# Altium PCB PC104Breakout.PcbDoc
Units mil, origin at the board's own origin, x right, y up, seen from the top; angles counter-clockwise.
Board outline 6500 x 2225 mil, 2 copper layers (Top Layer, Bottom Layer); 107 components, 105 nets, 212 pads, 0 vias.
Unrouted connection lines stored in the file: 1.
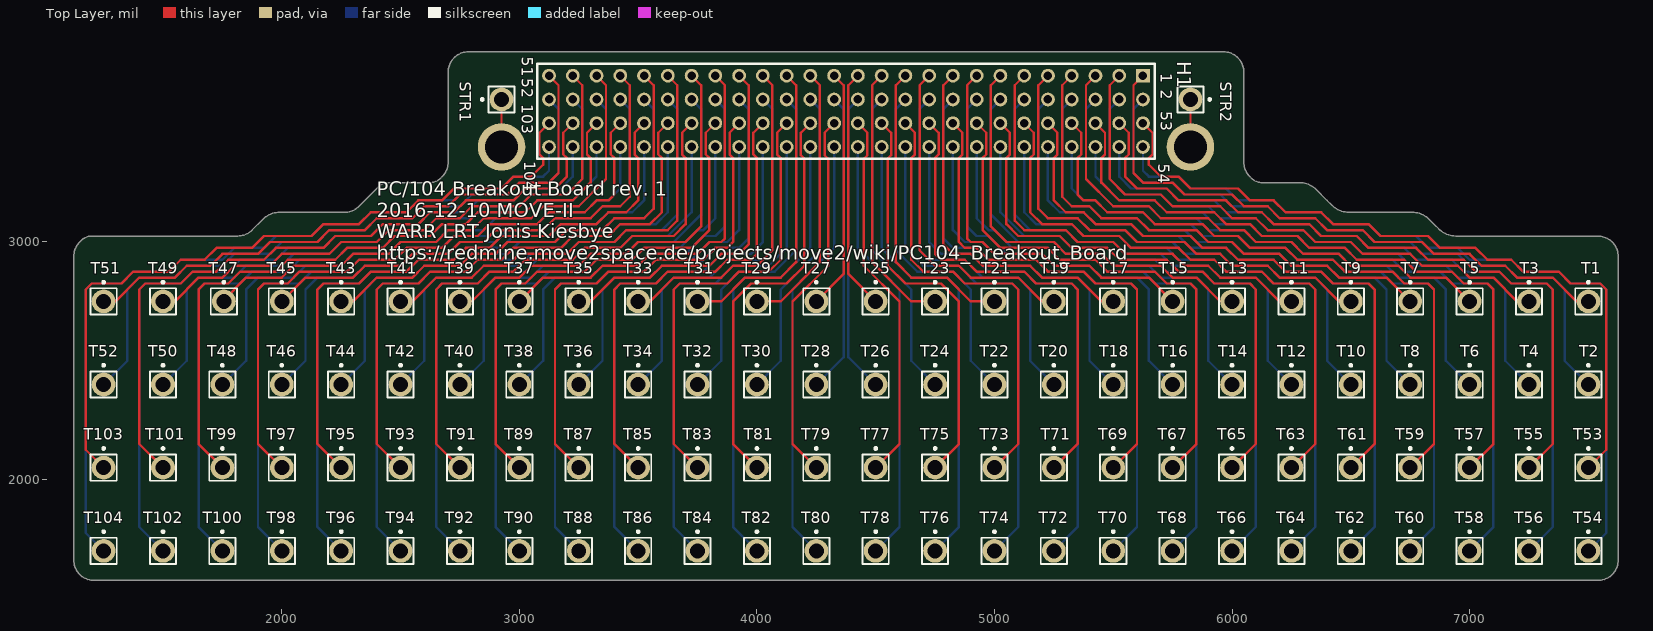
[diagram p0: Top Layer view]
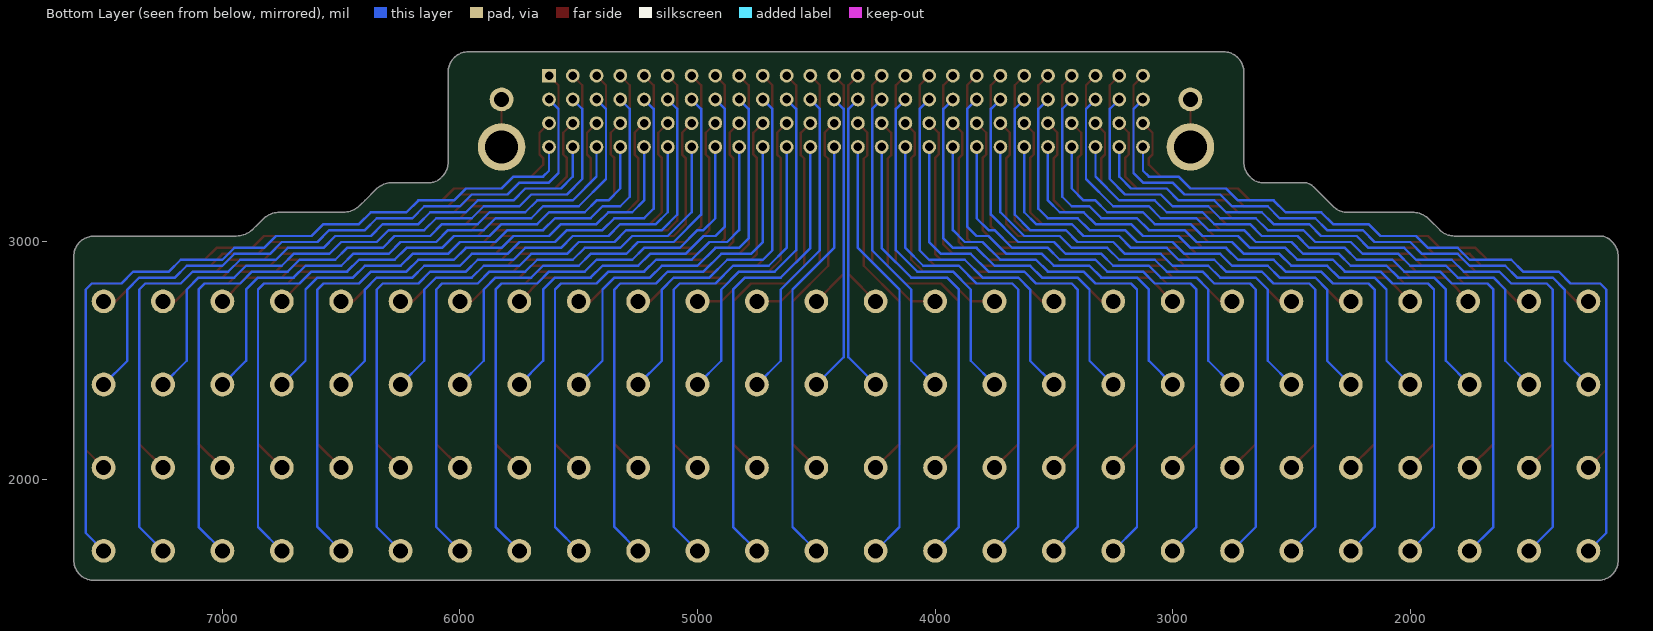
[diagram p1: Bottom Layer view, seen from below]

## Layer stack, top to bottom
Top Solder: solder mask 0.4, Solder Resist, Dk 3.5
Top Layer: signal copper 1.4
Dielectric 1: dielectric 12.6, FR-4, Dk 4.8
Bottom Layer: signal copper 1.4
Bottom Solder: solder mask 0.4, Solder Resist, Dk 3.5

## Board outline
1725,3025 1200,3025 ccw(c1200,2964.64) 1157.32,3007.32 1150,3000 ccw(c1210.36,2939.64) 1125,2939.64 1125,2700 1125,1660.36 ccw(c1210.36,1660.36) 1150,1600 ccw(c1210.36,1660.36) 1210.36,1575 1375,1575 7539.64,1575 ccw(c7539.64,1660.36) 7600,1600 ccw(c7539.64,1660.36) 7625,1660.36 7625,1700 7625,2939.64 ccw(c7539.64,2939.64) 7600,3000 ccw(c7539.64,2939.64) 7539.64,3025 7425,3025 7025,3025 6950,3025 6941.42,3025 cw(c6941.42,3125) 6870.71,3054.29 6850,3075 6829.29,3095.71 ccw(c6758.58,3025) 6758.58,3125 6500,3125 6491.42,3125 cw(c6491.42,3225) 6420.71,3154.29 6400,3175 6354.29,3220.71 ccw(c6283.58,3150) 6283.58,3250 6125,3250 cw(c6125,3310.36) 6082.32,3267.68 6075,3275 cw(c6135.36,3335.36) 6050,3335.36 6050,3400 6050,3633.58 6050,3714.64 ccw(c5964.64,3714.64) 6025,3775 ccw(c5964.64,3714.64) 5964.64,3800 5825,3800 2825,3800 2785.36,3800 ccw(c2785.36,3714.64) 2725,3775 ccw(c2785.36,3714.64) 2700,3714.64 2700,3575 2700,3335.36 cw(c2614.64,3335.36) 2675,3275 2667.68,3267.68 cw(c2625,3310.36) 2625,3250 2450,3250 ccw(c2450,3189.64) 2407.32,3232.32 2325,3150 cw(c2264.64,3210.36) 2264.64,3125 2250,3125 1991.42,3125 ccw(c1991.42,3025) 1920.71,3095.71 1875,3050 cw(c1814.64,3110.36) 1814.64,3025 1725,3025

## Design rules (kind name [scope] priority, off if disabled: settings)
Clearance [All] p1: gap=6
HoleSize [All] p1: absolutevalues=TRUE maxlimit=200 minlimit=1 maxpercent=80.000 minpercent=20.000
MinimumSolderMaskSliver [All] p1: minsoldermaskwidth=4
PolygonConnect [All] p1: connectstyle=Relief reliefconductorwidth=10 reliefentries=4 polygonreliefangle="90 Angle" airgapwidth=10
RoutingVias [All] p1: holewidth=28 width=50 viastyle="Through Hole" minholewidth=28 minwidth=50 maxholewidth=28 maxwidth=50
SolderMaskExpansion [All] p1: expansion=2
Width [All] p1: maxlimit=10 minlimit=6 preferedwidth=10
28 further rules are at their usual default settings.

## Components (designator, comment, footprint, x,y, rotation, side; value= is the part's Value field where it differs from the comment)
H1 "MOVE-II PC104" PC104 5625,3700 r180 top
STR1 "Testpoint" PIN1 2925,3600 r90 top
STR2 "Testpoint" PIN1 5825,3600 r270 top
T1 "Testpoint" PIN1 7500,2750 r0 top
T2 "Testpoint" PIN1 7500,2400 r0 top
T3 "Testpoint" PIN1 7250,2750 r0 top
T4 "Testpoint" PIN1 7250,2400 r0 top
T5 "Testpoint" PIN1 7000,2750 r0 top
T6 "Testpoint" PIN1 7000,2400 r0 top
T7 "Testpoint" PIN1 6750,2750 r0 top
T8 "Testpoint" PIN1 6750,2400 r0 top
T9 "Testpoint" PIN1 6500,2750 r0 top
T10 "Testpoint" PIN1 6500,2400 r0 top
T11 "Testpoint" PIN1 6250,2750 r0 top
T12 "Testpoint" PIN1 6250,2400 r0 top
T13 "Testpoint" PIN1 6000,2750 r0 top
T14 "Testpoint" PIN1 6000,2400 r0 top
T15 "Testpoint" PIN1 5750,2750 r0 top
T16 "Testpoint" PIN1 5750,2400 r0 top
T17 "Testpoint" PIN1 5500,2750 r0 top
T18 "Testpoint" PIN1 5500,2400 r0 top
T19 "Testpoint" PIN1 5250,2750 r0 top
T20 "Testpoint" PIN1 5250,2400 r0 top
T21 "Testpoint" PIN1 5000,2750 r0 top
T22 "Testpoint" PIN1 5000,2400 r0 top
T23 "Testpoint" PIN1 4750,2750 r0 top
T24 "Testpoint" PIN1 4750,2400 r0 top
T25 "Testpoint" PIN1 4500,2750 r0 top
T26 "Testpoint" PIN1 4500,2400 r0 top
T27 "Testpoint" PIN1 4250,2750 r0 top
T28 "Testpoint" PIN1 4250,2400 r0 top
T29 "Testpoint" PIN1 4000,2750 r0 top
T30 "Testpoint" PIN1 4000,2400 r0 top
T31 "Testpoint" PIN1 3750,2750 r0 top
T32 "Testpoint" PIN1 3750,2400 r0 top
T33 "Testpoint" PIN1 3500,2750 r0 top
T34 "Testpoint" PIN1 3500,2400 r0 top
T35 "Testpoint" PIN1 3250,2750 r0 top
T36 "Testpoint" PIN1 3250,2400 r0 top
T37 "Testpoint" PIN1 3000,2750 r0 top
T38 "Testpoint" PIN1 3000,2400 r0 top
T39 "Testpoint" PIN1 2750,2750 r0 top
T40 "Testpoint" PIN1 2750,2400 r0 top
T41 "Testpoint" PIN1 2500,2750 r0 top
T42 "Testpoint" PIN1 2500,2400 r0 top
T43 "Testpoint" PIN1 2250,2750 r0 top
T44 "Testpoint" PIN1 2250,2400 r0 top
T45 "Testpoint" PIN1 2000,2750 r0 top
T46 "Testpoint" PIN1 2000,2400 r0 top
T47 "Testpoint" PIN1 1756.24,2750 r0 top
T48 "Testpoint" PIN1 1750,2400 r0 top
T49 "Testpoint" PIN1 1500,2750 r0 top
T50 "Testpoint" PIN1 1500,2400 r0 top
T51 "Testpoint" PIN1 1250,2750 r0 top
T52 "Testpoint" PIN1 1250,2400 r0 top
T53 "Testpoint" PIN1 7500,2050 r0 top
T54 "Testpoint" PIN1 7500,1700 r0 top
T55 "Testpoint" PIN1 7250,2050 r0 top
T56 "Testpoint" PIN1 7250,1700 r0 top
T57 "Testpoint" PIN1 7000,2050 r0 top
T58 "Testpoint" PIN1 7000,1700 r0 top
T59 "Testpoint" PIN1 6750,2050 r0 top
T60 "Testpoint" PIN1 6750,1700 r0 top
T61 "Testpoint" PIN1 6500,2050 r0 top
T62 "Testpoint" PIN1 6500,1700 r0 top
T63 "Testpoint" PIN1 6250,2050 r0 top
T64 "Testpoint" PIN1 6250,1700 r0 top
T65 "Testpoint" PIN1 6000,2050 r0 top
T66 "Testpoint" PIN1 6000,1700 r0 top
T67 "Testpoint" PIN1 5750,2050 r0 top
T68 "Testpoint" PIN1 5750,1700 r0 top
T69 "Testpoint" PIN1 5500,2050 r0 top
T70 "Testpoint" PIN1 5500,1700 r0 top
T71 "Testpoint" PIN1 5250,2050 r0 top
T72 "Testpoint" PIN1 5250,1700 r0 top
T73 "Testpoint" PIN1 5000,2050 r0 top
T74 "Testpoint" PIN1 5000,1700 r0 top
T75 "Testpoint" PIN1 4750,2050 r0 top
T76 "Testpoint" PIN1 4750,1700 r0 top
T77 "Testpoint" PIN1 4500,2050 r0 top
T78 "Testpoint" PIN1 4500,1700 r0 top
T79 "Testpoint" PIN1 4250,2050 r0 top
T80 "Testpoint" PIN1 4250,1700 r0 top
T81 "Testpoint" PIN1 4000,2050 r0 top
T82 "Testpoint" PIN1 4000,1700 r0 top
T83 "Testpoint" PIN1 3750,2050 r0 top
T84 "Testpoint" PIN1 3750,1700 r0 top
T85 "Testpoint" PIN1 3500,2050 r0 top
T86 "Testpoint" PIN1 3500,1700 r0 top
T87 "Testpoint" PIN1 3250,2050 r0 top
T88 "Testpoint" PIN1 3250,1700 r0 top
T89 "Testpoint" PIN1 3000,2050 r0 top
T90 "Testpoint" PIN1 3000,1700 r0 top
T91 "Testpoint" PIN1 2750,2050 r0 top
T92 "Testpoint" PIN1 2750,1700 r0 top
T93 "Testpoint" PIN1 2500,2050 r0 top
T94 "Testpoint" PIN1 2500,1700 r0 top
T95 "Testpoint" PIN1 2250,2050 r0 top
T96 "Testpoint" PIN1 2250,1700 r0 top
T97 "Testpoint" PIN1 2000,2050 r0 top
T98 "Testpoint" PIN1 2000,1700 r0 top
T99 "Testpoint" PIN1 1750,2050 r0 top
T100 "Testpoint" PIN1 1750,1700 r0 top
T101 "Testpoint" PIN1 1500,2050 r0 top
T102 "Testpoint" PIN1 1500,1700 r0 top
T103 "Testpoint" PIN1 1250,2050 r0 top
T104 "Testpoint" PIN1 1250,1700 r0 top

## Footprints (in the part's own frame and the unit in brackets; to place one, negate y for a bottom-side part, rotate by r counter-clockwise, add the part's x,y. Pads: shape width x height; smd on the part's side, far side on the other; paste and mask are expansions set on the pad)
PC104 [mil] "3rd gen 1U EPS from clydespace"
  rect 58x58 hole 35.43: 1(0,0)
  round 58 hole 35.43: 2(0,100) 3(100,0) 4(100,100) 5(200,0) 6(200,100) 7(300,0) 8(300,100) 9(400,0) 10(400,100) 11(500,0) 12(500,100) 13(600,0) 14(600,100) 15(700,0) 16(700,100) 17(800,0) 18(800,100) 19(900,0) 20(900,100) 21(1000,0) 22(1000,100) 23(1100,0) 24(1100,100) 25(1200,0) 26(1200,100) 27(1300,0) 28(1300,100) 29(1400,0) 30(1400,100) 31(1500,0) 32(1500,100) 33(1600,0) 34(1600,100) 35(1700,0) 36(1700,100) 37(1800,0) 38(1800,100) 39(1900,0) 40(1900,100) 41(2000,0) 42(2000,100) 43(2100,0) 44(2100,100) 45(2200,0) 46(2200,100) 47(2300,0) 48(2300,100) 49(2400,0) 50(2400,100) 51(2500,0) 52(2500,100) 53(0,200) 54(0,300) 55(100,200) 56(100,300) 57(200,200) 58(200,300) 59(300,200) 60(300,300) 61(400,200) 62(400,300) 63(500,200) 64(500,300) 65(600,200) 66(600,300) 67(700,200) 68(700,300) 69(800,200) 70(800,300) 71(900,200) 72(900,300) 73(1000,200) 74(1000,300) 75(1100,200) 76(1100,300) 77(1200,200) 78(1200,300) 79(1300,200) 80(1300,300) 81(1400,200) 82(1400,300) 83(1500,200) 84(1500,300) 85(1600,200) 86(1600,300) 87(1700,200) 88(1700,300) 89(1800,200) 90(1800,300) 91(1900,200) 92(1900,300) 93(2000,200) 94(2000,300) 95(2100,200) 96(2100,300) 97(2200,200) 98(2200,300) 99(2300,200) 100(2300,300) 101(2400,200) 102(2400,300) 103(2500,200) 104(2500,300)
  silkscreen extent -50,-50 2550,350
PIN1 [mil] "Connector; Plug"
  round 100 hole 63: 1(0,0)
  silkscreen extent -55,-55 55,86

## Part data
STR1 STR2 T1 T2 T3 T4 T5 T6 T7 T8 T9 T10 T11 T12 T13 T14 T15 T16 T17 T18 T19 T20 T21 T22 T23 T24 T25 T26 T27 T28 T29 T30 T31 T32 T33 T34 T35 T36 T37 T38 T39 T40 T41 T42 T43 T44 T45 T46 T47 T48 T49 T50 T51 T52 T53 T54 T55 T56 T57 T58 T59 T60 T61 T62 T63 T64 T65 T66 T67 T68 T69 T70 T71 T72 T73 T74 T75 T76 T77 T78 T79 T80 T81 T82 T83 T84 T85 T86 T87 T88 T89 T90 T91 T92 T93 T94 T95 T96 T97 T98 T99 T100 T101 T102 T103 T104: library part Plug, "Plug"

## Free pads (board coordinates)
  round 200 hole 138: 2(5825,3400) 3(2925,3400)

## Nets (pads, with @x,y where several pads share a name; then routed paths per layer and width w, separated by ;. In a path a pad name is that pad's centre, name@x,y a point inside that pad or via, vN(x,y) a via of type N, cw(c..) or ccw(c..) an arc to the next point about the centre after c; other vN are vias at no path point)
CHASSIS: pad.2 pad.3 STR1.1 STR2.1 | length 400
  Top Layer w10: pad.3 STR1.1 ; pad.2 STR2.1
TRACE1: H1.1 T1.1 | length 2565.2
  Top Layer w10: H1.1 5585,3660 5585,3290 5625,3250 5750,3250 5800,3200 6000,3200 6050,3150 6150,3150 6200,3100 6350,3100 6400,3050 6550,3050 6600,3000 6800,3000 6850,2950 7000,2950 7050,2900 7150,2900 7200,2850 7350,2850 7450,2750 T1.1
TRACE2: H1.2 T2.1 | length 2786
  Bottom Layer w10: H1.2 5585,3560 5585,3290 5625,3250 5750,3250 5800,3200 5950,3200 6000,3150 6150,3150 6200,3100 6350,3100 6400,3050 6550,3050 6600,3000 6750,3000 6800,2950 6950,2950 7000,2900 7150,2900 7200,2850 7350,2850 7400,2800 7400,2500 T2.1
TRACE3: H1.3 T3.1 | length 2429.9
  Top Layer w10: H1.3 5485,3660 5485,3265 5550,3200 5700,3200 5750,3150 5950,3150 6000,3100 6100,3100 6150,3050 6300,3050 6350,3000 6500,3000 6550,2950 6750,2950 6800,2900 6950,2900 7000,2850 7100,2850 7200,2750 T3.1
TRACE4: H1.4 T4.1 | length 2650.6
  Bottom Layer w10: H1.4 5485,3560 5485,3265 5550,3200 5700,3200 5750,3150 5900,3150 5950,3100 6100,3100 6150,3050 6300,3050 6350,3000 6500,3000 6550,2950 6700,2950 6750,2900 6900,2900 6950,2850 7100,2850 7150,2800 7150,2500 T4.1
TRACE5: H1.5 T5.1 | length 2279.9
  Top Layer w10: H1.5 5385,3660 5385,3265 5500,3150 5650,3150 5700,3100 5900,3100 5950,3050 6050,3050 6100,3000 6250,3000 6300,2950 6450,2950 6500,2900 6700,2900 6750,2850 6900,2850 T5.1
TRACE6: H1.6 T6.1 | length 2500.6
  Bottom Layer w10: H1.6 5385,3560 5385,3265 5500,3150 5650,3150 5700,3100 5850,3100 5900,3050 6050,3050 6100,3000 6250,3000 6300,2950 6450,2950 6500,2900 6650,2900 6700,2850 6850,2850 6900,2800 6900,2500 T6.1
TRACE7: H1.7 T7.1 | length 2173.8
  Top Layer w10: H1.7 5285,3660 5285,3190 5325,3150 5400,3150 5450,3100 5600,3100 5650,3050 5850,3050 5900,3000 6000,3000 6050,2950 6200,2950 6250,2900 6400,2900 6450,2850 6650,2850 T7.1
TRACE8: H1.8 T8.1 | length 2394.5
  Bottom Layer w10: H1.8 5285,3560 5285,3190 5325,3150 5400,3150 5450,3100 5600,3100 5650,3050 5800,3050 5850,3000 6000,3000 6050,2950 6200,2950 6250,2900 6400,2900 6450,2850 6600,2850 6650,2800 6650,2500 T8.1
TRACE9: H1.9 T9.1 | length 2053.1
  Top Layer w10: H1.9 5185,3660 5185,3140 5225,3100 5350,3100 5400,3050 5550,3050 5600,3000 5800,3000 5850,2950 5950,2950 6000,2900 6150,2900 6200,2850 6350,2850 6450,2750 T9.1
TRACE10: H1.10 T10.1 | length 2273.8
  Bottom Layer w10: H1.10 5185,3560 5185,3140 5225,3100 5350,3100 5400,3050 5550,3050 5600,3000 5750,3000 5800,2950 5950,2950 6000,2900 6150,2900 6200,2850 6350,2850 6400,2800 6400,2500 T10.1
TRACE11: H1.11 T11.1 | length 1932.4
  Top Layer w10: H1.11 5085,3660 5085,3090 5125,3050 5300,3050 5350,3000 5500,3000 5550,2950 5750,2950 5800,2900 5900,2900 5950,2850 6100,2850 6200,2750 T11.1
TRACE12: H1.12 T12.1 | length 2138.5
  Bottom Layer w10: H1.12 5085,3560 5085,3115 5150,3050 5300,3050 5350,3000 5500,3000 5550,2950 5700,2950 5750,2900 5900,2900 5950,2850 6100,2850 6150,2800 6150,2500 T12.1
TRACE13: H1.13 T13.1 | length 1797
  Top Layer w10: H1.13 4985,3660 4985,3065 5050,3000 5250,3000 5300,2950 5450,2950 5500,2900 5700,2900 5750,2850 5850,2850 5950,2750 T13.1
TRACE14: H1.14 T14.1 | length 1988.5
  Bottom Layer w10: H1.14 4985,3560 4985,3115 5100,3000 5250,3000 5300,2950 5450,2950 5500,2900 5650,2900 5700,2850 5850,2850 5900,2800 5900,2500 T14.1
TRACE15: H1.15 T15.1 | length 1676.3
  Top Layer w10: H1.15 4885,3660 4885,3015 4900,3000 4950,3000 5000,2950 5200,2950 5250,2900 5400,2900 5450,2850 5650,2850 T15.1
TRACE16: H1.16 T16.1 | length 1867.8
  Bottom Layer w10: H1.16 4885,3560 4885,3065 4925,3025 4975,3025 5050,2950 5200,2950 5250,2900 5400,2900 5450,2850 5600,2850 5650,2800 5650,2500 T16.1
TRACE17: H1.17 T17.1 | length 1541
  Top Layer w10: H1.17 4785,3660 4785,2990 4825,2950 4900,2950 4950,2900 5150,2900 5200,2850 5350,2850 5450,2750 T17.1
TRACE18: H1.18 T18.1 | length 1747
  Bottom Layer w10: H1.18 4785,3560 4785,3015 4825,2975 4925,2975 5000,2900 5150,2900 5200,2850 5350,2850 5400,2800 5400,2500 T18.1
TRACE19: H1.19 T19.1 | length 1405.6
  Top Layer w10: H1.19 4685,3660 4685,2965 4750,2900 4850,2900 4900,2850 5100,2850 5200,2750 T19.1
TRACE20: H1.20 T20.1 | length 1626.3
  Bottom Layer w10: H1.20 4685,3560 4685,2965 4725,2925 4875,2925 4950,2850 5100,2850 5150,2800 5150,2500 T20.1
TRACE21: H1.21 T21.1 | length 1284.9
  Top Layer w10: H1.21 4585,3660 4585,2915 4650,2850 4800,2850 4900,2750 T21.1
TRACE22: H1.22 T22.1 | length 1476.3
  Bottom Layer w10: H1.22 4585,3560 4585,2965 4675,2875 4825,2875 4900,2800 4900,2500 T22.1
TRACE23: H1.23 T23.1 | length 1134.9
  Top Layer w10: H1.23 4485,3660 4485,2915 4650,2750 T23.1
TRACE24: H1.24 T24.1 | length 1326.3
  Bottom Layer w10: H1.24 4485,3560 4485,2965 4650,2800 4650,2500 T24.1
TRACE25: H1.25 T25.1 | length 1014.2
  Top Layer w10: H1.25 4385,3660 4385,2865 T25.1
TRACE26: H1.26 T26.1 | length 1264.2
  Bottom Layer w10: H1.26 4385,3560 4385,2515 T26.1
TRACE27: H1.27 T27.1 | length 1014.2
  Top Layer w10: T27.1 4365,2865 4365,3660 H1.27
TRACE28: H1.28 T28.1 | length 1264.2
  Bottom Layer w10: T28.1 4365,2515 4365,3560 H1.28
TRACE29: H1.29 T29.1 | length 1134.9
  Top Layer w10: T29.1 4100,2750 4265,2915 4265,3660 H1.29
TRACE30: H1.30 T30.1 | length 1326.3
  Bottom Layer w10: T30.1 4100,2500 4100,2800 4265,2965 4265,3560 H1.30
TRACE31: H1.31 T31.1 | length 1284.9
  Top Layer w10: T31.1 3850,2750 3950,2850 4100,2850 4165,2915 4165,3660 H1.31
TRACE32: H1.32 T32.1 | length 1476.3
  Bottom Layer w10: T32.1 3850,2500 3850,2800 3925,2875 4075,2875 4165,2965 4165,3560 H1.32
TRACE33: H1.33 T33.1 | length 1405.6
  Top Layer w10: T33.1 3550,2750 3650,2850 3850,2850 3900,2900 4000,2900 4065,2965 4065,3660 H1.33
TRACE34: H1.34 T34.1 | length 1626.3
  Bottom Layer w10: T34.1 3600,2500 3600,2800 3650,2850 3800,2850 3875,2925 4025,2925 4065,2965 4065,3560 H1.34
TRACE35: H1.35 T35.1 | length 1541
  Top Layer w10: T35.1 3300,2750 3400,2850 3550,2850 3600,2900 3800,2900 3850,2950 3925,2950 3965,2990 3965,3660 H1.35
TRACE36: H1.36 T36.1 | length 1747
  Bottom Layer w10: T36.1 3350,2500 3350,2800 3400,2850 3550,2850 3600,2900 3750,2900 3825,2975 3925,2975 3965,3015 3965,3560 H1.36
TRACE37: H1.37 T37.1 | length 1676.3
  Top Layer w10: T37.1 3100,2850 3300,2850 3350,2900 3500,2900 3550,2950 3750,2950 3800,3000 3850,3000 3865,3015 3865,3660 H1.37
TRACE38: H1.38 T38.1 | length 1867.8
  Bottom Layer w10: T38.1 3100,2500 3100,2800 3150,2850 3300,2850 3350,2900 3500,2900 3550,2950 3700,2950 3775,3025 3825,3025 3865,3065 3865,3560 H1.38
TRACE39: H1.39 T39.1 | length 1797
  Top Layer w10: T39.1 2800,2750 2900,2850 3000,2850 3050,2900 3250,2900 3300,2950 3450,2950 3500,3000 3700,3000 3765,3065 3765,3660 H1.39
TRACE40: H1.40 T40.1 | length 1988.5
  Bottom Layer w10: T40.1 2850,2500 2850,2800 2900,2850 3050,2850 3100,2900 3250,2900 3300,2950 3450,2950 3500,3000 3650,3000 3765,3115 3765,3560 H1.40
TRACE41: H1.41 T41.1 | length 1932.4
  Top Layer w10: T41.1 2550,2750 2650,2850 2800,2850 2850,2900 2950,2900 3000,2950 3200,2950 3250,3000 3400,3000 3450,3050 3625,3050 3665,3090 3665,3660 H1.41
TRACE42: H1.42 T42.1 | length 2138.5
  Bottom Layer w10: T42.1 2600,2500 2600,2800 2650,2850 2800,2850 2850,2900 3000,2900 3050,2950 3200,2950 3250,3000 3400,3000 3450,3050 3600,3050 3665,3115 3665,3560 H1.42
TRACE43: H1.43 T43.1 | length 2053.1
  Top Layer w10: T43.1 2300,2750 2400,2850 2550,2850 2600,2900 2750,2900 2800,2950 2900,2950 2950,3000 3150,3000 3200,3050 3350,3050 3400,3100 3525,3100 3565,3140 3565,3660 H1.43
TRACE44: H1.44 T44.1 | length 2273.8
  Bottom Layer w10: T44.1 2350,2500 2350,2800 2400,2850 2550,2850 2600,2900 2750,2900 2800,2950 2950,2950 3000,3000 3150,3000 3200,3050 3350,3050 3400,3100 3525,3100 3565,3140 3565,3560 H1.44
TRACE45: H1.45 T45.1 | length 2173.8
  Top Layer w10: T45.1 2100,2850 2300,2850 2350,2900 2500,2900 2550,2950 2700,2950 2750,3000 2850,3000 2900,3050 3100,3050 3150,3100 3300,3100 3350,3150 3425,3150 3465,3190 3465,3660 H1.45
TRACE46: H1.46 T46.1 | length 2394.5
  Bottom Layer w10: T46.1 2100,2500 2100,2800 2150,2850 2300,2850 2350,2900 2500,2900 2550,2950 2700,2950 2750,3000 2900,3000 2950,3050 3100,3050 3150,3100 3300,3100 3350,3150 3425,3150 3465,3190 3465,3560 H1.46
TRACE47: H1.47 T47.1 | length 2279.9
  Top Layer w10: T47.1@1750,2750 1850,2850 2000,2850 2050,2900 2250,2900 2300,2950 2450,2950 2500,3000 2650,3000 2700,3050 2800,3050 2850,3100 3050,3100 3100,3150 3250,3150 3365,3265 3365,3660 H1.47
TRACE48: H1.48 T48.1 | length 2500.6
  Bottom Layer w10: T48.1 1850,2500 1850,2800 1900,2850 2050,2850 2100,2900 2250,2900 2300,2950 2450,2950 2500,3000 2650,3000 2700,3050 2850,3050 2900,3100 3050,3100 3100,3150 3250,3150 3365,3265 3365,3560 H1.48
TRACE49: H1.49 T49.1 | length 2429.9
  Top Layer w10: T49.1 1550,2750 1650,2850 1750,2850 1800,2900 1950,2900 2000,2950 2200,2950 2250,3000 2400,3000 2450,3050 2600,3050 2650,3100 2750,3100 2800,3150 3000,3150 3050,3200 3200,3200 3265,3265 3265,3660 H1.49
TRACE50: H1.50 T50.1 | length 2650.6
  Bottom Layer w10: T50.1 1600,2500 1600,2800 1650,2850 1800,2850 1850,2900 2000,2900 2050,2950 2200,2950 2250,3000 2400,3000 2450,3050 2600,3050 2650,3100 2800,3100 2850,3150 3000,3150 3050,3200 3200,3200 3265,3265 3265,3560 H1.50
TRACE51: H1.51 T51.1 | length 2565.2
  Top Layer w10: T51.1 1300,2750 1400,2850 1550,2850 1600,2900 1700,2900 1750,2950 1900,2950 1950,3000 2150,3000 2200,3050 2350,3050 2400,3100 2550,3100 2600,3150 2700,3150 2750,3200 2950,3200 3000,3250 3125,3250 3165,3290 3165,3660 H1.51
TRACE52: H1.52 T52.1 | length 2786
  Bottom Layer w10: T52.1 1350,2500 1350,2800 1400,2850 1550,2850 1600,2900 1750,2900 1800,2950 1950,2950 2000,3000 2150,3000 2200,3050 2350,3050 2400,3100 2550,3100 2600,3150 2750,3150 2800,3200 2950,3200 3000,3250 3125,3250 3165,3290 3165,3560 H1.52
TRACE53: H1.53 T53.1 | length 3121.3
  Top Layer w10: H1.53 5665,3460 5665,3368.43 5650,3353.43 5650,3325 5700,3275 5775,3275 5825,3225 6025,3225 6075,3175 6175,3175 6225,3125 6375,3125 6425,3075 6575,3075 6625,3025 6825,3025 6875,2975 7025,2975 7075,2925 7175,2925 7225,2875 7375,2875 7425,2825 7550,2825 7575,2800 7575,2125 T53.1
TRACE54: H1.54 T54.1 | length 3388.2
  Bottom Layer w10: H1.54 5625,3300 5650,3275 5775,3275 5825,3225 5975,3225 6025,3175 6175,3175 6225,3125 6375,3125 6425,3075 6575,3075 6625,3025 6775,3025 6825,2975 6950,2975 7000,2925 7175,2925 7225,2875 7375,2875 7425,2825 7550,2825 7575,2800 7575,1775 T54.1
TRACE55: H1.55 T55.1 | length 3036
  Top Layer w10: H1.55 5565,3460 5565,3368.43 5550,3353.43 5550,3275 5600,3225 5725,3225 5775,3175 5975,3175 6025,3125 6125,3125 6175,3075 6325,3075 6375,3025 6525,3025 6575,2975 6775,2975 6825,2925 6975,2925 7025,2875 7125,2875 7175,2825 7325,2825 7350,2800 7350,2150 T55.1
TRACE56: H1.56 T56.1 | length 3288.2
  Bottom Layer w10: H1.56 5525,3275 5575,3225 5725,3225 5775,3175 5925,3175 5975,3125 6125,3125 6175,3075 6325,3075 6375,3025 6525,3025 6575,2975 6725,2975 6775,2925 6925,2925 6975,2875 7125,2875 7175,2825 7325,2825 7350,2800 7350,1800 T56.1
TRACE57: H1.57 T57.1 | length 2900.6
  Top Layer w10: H1.57 5465,3460 5465,3368.43 5450,3353.43 5450,3250 5525,3175 5675,3175 5725,3125 5925,3125 5975,3075 6075,3075 6125,3025 6275,3025 6325,2975 6475,2975 6525,2925 6725,2925 6775,2875 6925,2875 6975,2825 7075,2825 7100,2800 7100,2150 T57.1
TRACE58: H1.58 T58.1 | length 3138.2
  Bottom Layer w10: H1.58 5425,3275 5525,3175 5675,3175 5725,3125 5875,3125 5925,3075 6075,3075 6125,3025 6275,3025 6325,2975 6475,2975 6525,2925 6675,2925 6725,2875 6875,2875 6925,2825 7075,2825 7100,2800 7100,1800 T58.1
TRACE59: H1.59 T59.1 | length 2779.9
  Top Layer w10: H1.59 5365,3460 5365,3368.43 5350,3353.43 5350,3200 5375,3175 5425,3175 5475,3125 5625,3125 5675,3075 5875,3075 5925,3025 6025,3025 6075,2975 6225,2975 6275,2925 6425,2925 6475,2875 6675,2875 6725,2825 6825,2825 6850,2800 6850,2150 T59.1
TRACE60: H1.60 T60.1 | length 3017.5
  Bottom Layer w10: H1.60 5325,3225 5375,3175 5425,3175 5475,3125 5625,3125 5675,3075 5825,3075 5875,3025 6025,3025 6075,2975 6225,2975 6275,2925 6425,2925 6475,2875 6625,2875 6675,2825 6825,2825 6850,2800 6850,1800 T60.1
TRACE61: H1.61 T61.1 | length 2644.5
  Top Layer w10: H1.61 5265,3460 5265,3368.43 5250,3353.43 5250,3175 5300,3125 5375,3125 5425,3075 5575,3075 5625,3025 5825,3025 5875,2975 5975,2975 6025,2925 6175,2925 6225,2875 6375,2875 6425,2825 6575,2825 6600,2800 6600,2150 T61.1
TRACE62: H1.62 T62.1 | length 2896.8
  Bottom Layer w10: H1.62 5225,3175 5275,3125 5375,3125 5425,3075 5575,3075 5625,3025 5775,3025 5825,2975 5975,2975 6025,2925 6175,2925 6225,2875 6375,2875 6425,2825 6575,2825 6600,2800 6600,1800 T62.1
TRACE63: H1.63 T63.1 | length 2523.8
  Top Layer w10: H1.63 5165,3460 5165,3368.43 5150,3353.43 5150,3125 5200,3075 5325,3075 5375,3025 5525,3025 5575,2975 5775,2975 5825,2925 5925,2925 5975,2875 6125,2875 6175,2825 6325,2825 6350,2800 6350,2150 T63.1
TRACE64: H1.64 T64.1 | length 2776
  Bottom Layer w10: H1.64 5125,3125 5175,3075 5325,3075 5375,3025 5525,3025 5575,2975 5725,2975 5775,2925 5925,2925 5975,2875 6125,2875 6175,2825 6325,2825 6350,2800 6350,1800 T64.1
TRACE65: H1.65 T65.1 | length 2403.1
  Top Layer w10: H1.65 5065,3460 5065,3368.43 5050,3353.43 5050,3075 5100,3025 5275,3025 5325,2975 5475,2975 5525,2925 5725,2925 5775,2875 5875,2875 5925,2825 6075,2825 6100,2800 6100,2150 T65.1
TRACE66: H1.66 T66.1 | length 2626
  Bottom Layer w10: H1.66 5025,3125 5125,3025 5275,3025 5325,2975 5475,2975 5525,2925 5675,2925 5725,2875 5875,2875 5925,2825 6075,2825 6100,2800 6100,1800 T66.1
TRACE67: H1.67 T67.1 | length 2267.8
  Top Layer w10: H1.67 4965,3460 4965,3368.43 4950,3353.43 4950,3050 5025,2975 5225,2975 5275,2925 5425,2925 5475,2875 5675,2875 5725,2825 5825,2825 5850,2800 5850,2150 T67.1
TRACE68: H1.68 T68.1 | length 2490.7
  Bottom Layer w10: H1.68 4925,3100 4975,3050 5000,3050 5075,2975 5225,2975 5275,2925 5425,2925 5475,2875 5625,2875 5675,2825 5825,2825 5850,2800 5850,1800 T68.1
TRACE69: H1.69 T69.1 | length 2147
  Top Layer w10: H1.69 4865,3460 4865,3368.43 4850,3353.43 4850,3000 4875,2975 4925,2975 4975,2925 5175,2925 5225,2875 5375,2875 5425,2825 5575,2825 5600,2800 5600,2150 T69.1
TRACE70: H1.70 T70.1 | length 2370
  Bottom Layer w10: H1.70 4825,3050 4875,3000 4950,3000 5025,2925 5175,2925 5225,2875 5375,2875 5425,2825 5575,2825 5600,2800 5600,1800 T70.1
TRACE71: H1.71 T71.1 | length 2026.3
  Top Layer w10: H1.71 4765,3460 4765,3368.43 4750,3353.43 4750,2950 4775,2925 4875,2925 4925,2875 5125,2875 5175,2825 5325,2825 5350,2800 5350,2150 T71.1
TRACE72: H1.72 T72.1 | length 2249.3
  Bottom Layer w10: H1.72 4725,3000 4775,2950 4900,2950 4975,2875 5125,2875 5175,2825 5325,2825 5350,2800 5350,1800 T72.1
TRACE73: H1.73 T73.1 | length 1891
  Top Layer w10: H1.73 4665,3460 4665,3368.43 4650,3353.43 4650,2925 4700,2875 4825,2875 4875,2825 5075,2825 5100,2800 5100,2150 T73.1
TRACE74: H1.74 T74.1 | length 2113.9
  Bottom Layer w10: H1.74 4625,2975 4700,2900 4850,2900 4925,2825 5075,2825 5100,2800 5100,1800 T74.1
TRACE75: H1.75 T75.1 | length 1726.3
  Top Layer w10: H1.75 4565,3460 4565,3365 4550,3350 4550,2900 4625,2825 4775,2825 4850,2750 4850,2150 T75.1
TRACE76: H1.76 T76.1 | length 1963.9
  Bottom Layer w10: H1.76 4525,2975 4650,2850 4800,2850 4850,2800 4850,1800 T76.1
TRACE77: H1.77 T77.1 | length 1576.3
  Top Layer w10: H1.77 4465,3460 4465,3365 4450,3350 4450,2900 4600,2750 4600,2150 T77.1
TRACE78: H1.78 T78.1 | length 1813.9
  Bottom Layer w10: H1.78 4425,2975 4600,2800 4600,1800 T78.1
TRACE79: H1.79 T79.1 | length 1576.3
  Top Layer w10: T79.1 4150,2150 4150,2750 4300,2900 4300,3350 4285,3365 4285,3460 H1.79
TRACE80: H1.80 T80.1 | length 1813.9
  Bottom Layer w10: T80.1 4150,1800 4150,2800 4325,2975 H1.80
TRACE81: H1.81 T81.1 | length 1726.3
  Top Layer w10: T81.1 3900,2150 3900,2750 3975,2825 4125,2825 4200,2900 4200,3350 4185,3365 4185,3460 H1.81
TRACE82: H1.82 T82.1 | length 1963.9
  Bottom Layer w10: T82.1 3900,1800 3900,2800 3950,2850 4100,2850 4225,2975 H1.82
TRACE83: H1.83 T83.1 | length 1891
  Top Layer w10: T83.1 3650,2150 3650,2800 3675,2825 3875,2825 3925,2875 4050,2875 4100,2925 4100,3353.43 4085,3368.43 4085,3460 H1.83
TRACE84: H1.84 T84.1 | length 2113.9
  Bottom Layer w10: T84.1 3650,1800 3650,2800 3675,2825 3825,2825 3900,2900 4050,2900 4125,2975 H1.84
TRACE85: H1.85 T85.1 | length 2026.3
  Top Layer w10: T85.1 3400,2150 3400,2800 3425,2825 3575,2825 3625,2875 3825,2875 3875,2925 3975,2925 4000,2950 4000,3353.43 3985,3368.43 3985,3460 H1.85
TRACE86: H1.86 T86.1 | length 2249.3
  Bottom Layer w10: T86.1 3400,1800 3400,2800 3425,2825 3575,2825 3625,2875 3775,2875 3850,2950 3975,2950 4025,3000 H1.86
TRACE87: H1.87 T87.1 | length 2147
  Top Layer w10: T87.1 3150,2150 3150,2800 3175,2825 3325,2825 3375,2875 3525,2875 3575,2925 3775,2925 3825,2975 3875,2975 3900,3000 3900,3353.43 3885,3368.43 3885,3460 H1.87
TRACE88: H1.88 T88.1 | length 2370
  Bottom Layer w10: T88.1 3150,1800 3150,2800 3175,2825 3325,2825 3375,2875 3525,2875 3575,2925 3725,2925 3800,3000 3875,3000 3925,3050 H1.88
TRACE89: H1.89 T89.1 | length 2267.8
  Top Layer w10: T89.1 2900,2150 2900,2800 2925,2825 3025,2825 3075,2875 3275,2875 3325,2925 3475,2925 3525,2975 3725,2975 3800,3050 3800,3353.43 3785,3368.43 3785,3460 H1.89
TRACE90: H1.90 T90.1 | length 2490.7
  Bottom Layer w10: T90.1 2900,1800 2900,2800 2925,2825 3075,2825 3125,2875 3275,2875 3325,2925 3475,2925 3525,2975 3675,2975 3750,3050 3775,3050 3825,3100 H1.90
TRACE91: H1.91 T91.1 | length 2403.1
  Top Layer w10: T91.1 2650,2150 2650,2800 2675,2825 2825,2825 2875,2875 2975,2875 3025,2925 3225,2925 3275,2975 3425,2975 3475,3025 3650,3025 3700,3075 3700,3353.43 3685,3368.43 3685,3460 H1.91
TRACE92: H1.92 T92.1 | length 2626
  Bottom Layer w10: T92.1 2650,1800 2650,2800 2675,2825 2825,2825 2875,2875 3025,2875 3075,2925 3225,2925 3275,2975 3425,2975 3475,3025 3625,3025 3725,3125 H1.92
TRACE93: H1.93 T93.1 | length 2523.8
  Top Layer w10: T93.1 2400,2150 2400,2800 2425,2825 2575,2825 2625,2875 2775,2875 2825,2925 2925,2925 2975,2975 3175,2975 3225,3025 3375,3025 3425,3075 3550,3075 3600,3125 3600,3353.43 3585,3368.43 3585,3460 H1.93
TRACE94: H1.94 T94.1 | length 2776
  Bottom Layer w10: T94.1 2400,1800 2400,2800 2425,2825 2575,2825 2625,2875 2775,2875 2825,2925 2975,2925 3025,2975 3175,2975 3225,3025 3375,3025 3425,3075 3575,3075 3625,3125 H1.94
TRACE95: H1.95 T95.1 | length 2644.5
  Top Layer w10: T95.1 2150,2150 2150,2800 2175,2825 2325,2825 2375,2875 2525,2875 2575,2925 2725,2925 2775,2975 2875,2975 2925,3025 3125,3025 3175,3075 3325,3075 3375,3125 3450,3125 3500,3175 3500,3353.43 3485,3368.43 3485,3460 H1.95
TRACE96: H1.96 T96.1 | length 2896.8
  Bottom Layer w10: T96.1 2150,1800 2150,2800 2175,2825 2325,2825 2375,2875 2525,2875 2575,2925 2725,2925 2775,2975 2925,2975 2975,3025 3125,3025 3175,3075 3325,3075 3375,3125 3475,3125 3525,3175 H1.96
TRACE97: H1.97 T97.1 | length 2779.9
  Top Layer w10: T97.1 1900,2150 1900,2800 1925,2825 2025,2825 2075,2875 2275,2875 2325,2925 2475,2925 2525,2975 2675,2975 2725,3025 2825,3025 2875,3075 3075,3075 3125,3125 3275,3125 3325,3175 3375,3175 3400,3200 3400,3353.43 3385,3368.43 3385,3460 H1.97
TRACE98: H1.98 T98.1 | length 3017.5
  Bottom Layer w10: T98.1 1900,1800 1900,2800 1925,2825 2075,2825 2125,2875 2275,2875 2325,2925 2475,2925 2525,2975 2675,2975 2725,3025 2875,3025 2925,3075 3075,3075 3125,3125 3275,3125 3325,3175 3375,3175 3425,3225 H1.98
TRACE99: H1.99 T99.1 | length 2900.6
  Top Layer w10: T99.1 1650,2150 1650,2800 1675,2825 1775,2825 1825,2875 1975,2875 2025,2925 2225,2925 2275,2975 2425,2975 2475,3025 2625,3025 2675,3075 2775,3075 2825,3125 3025,3125 3075,3175 3225,3175 3300,3250 3300,3353.43 3285,3368.43 3285,3460 H1.99
TRACE100: H1.100 T100.1 | length 3138.2
  Bottom Layer w10: T100.1 1650,1800 1650,2800 1675,2825 1825,2825 1875,2875 2025,2875 2075,2925 2225,2925 2275,2975 2425,2975 2475,3025 2625,3025 2675,3075 2825,3075 2875,3125 3025,3125 3075,3175 3225,3175 3325,3275 H1.100
TRACE101: H1.101 T101.1 | length 3036
  Top Layer w10: T101.1 1400,2150 1400,2800 1425,2825 1575,2825 1625,2875 1725,2875 1775,2925 1925,2925 1975,2975 2175,2975 2225,3025 2375,3025 2425,3075 2575,3075 2625,3125 2725,3125 2775,3175 2975,3175 3025,3225 3150,3225 3200,3275 3200,3353.43 3185,3368.43 3185,3460 H1.101
TRACE102: H1.102 T102.1 | length 3288.2
  Bottom Layer w10: T102.1 1400,1800 1400,2800 1425,2825 1575,2825 1625,2875 1775,2875 1825,2925 1975,2925 2025,2975 2175,2975 2225,3025 2375,3025 2425,3075 2575,3075 2625,3125 2775,3125 2825,3175 2975,3175 3025,3225 3175,3225 3225,3275 H1.102
TRACE103: H1.103 T103.1 | length 3121.3
  Top Layer w10: T103.1 1175,2125 1175,2800 1200,2825 1325,2825 1375,2875 1525,2875 1575,2925 1675,2925 1725,2975 1875,2975 1925,3025 2125,3025 2175,3075 2325,3075 2375,3125 2525,3125 2575,3175 2675,3175 2725,3225 2925,3225 2975,3275 3050,3275 3100,3325 3100,3353.43 3085,3368.43 3085,3460 H1.103
TRACE104: H1.104 T104.1 | length 3388.2
  Bottom Layer w10: T104.1 1175,1775 1175,2800 1200,2825 1325,2825 1375,2875 1525,2875 1575,2925 1750,2925 1800,2975 1925,2975 1975,3025 2125,3025 2175,3075 2325,3075 2375,3125 2525,3125 2575,3175 2725,3175 2775,3225 2925,3225 2975,3275 3100,3275 3125,3300 H1.104

## Silkscreen, mask and mechanical layers (free items; w line width, h text height)
Top Overlay:
  text "51" at 3010,3780 h47 r270
  text "1" at 5700,3710 h47 r270
  text "52" at 3010,3690 h47 r270
  text "2" at 5700,3640 h47 r270
  text "103" at 3010,3580 h47 r270
  text "53" at 5700,3550 h47 r270
  text "104" at 3020,3340 h47 r270
  text "54" at 5690,3330 h47 r270
  text "PC/104 Breakout Board rev. 1 / 2016-12-10 MOVE-II / WARR LRT Jonis Kiesbye / https://redmine.move2space.de/projects/move2/wiki/PC104_Breakout_Board" at 2400,2925 h60
Mechanical 1:
  the board outline again, w10

## Dimensions
1375,1575 to 2825,3800 on Top Overlay
7625,2939.64 to 1125,2700 on Top Overlay